# EAGLE board VERSAO-01 (EAGLE 5.06)
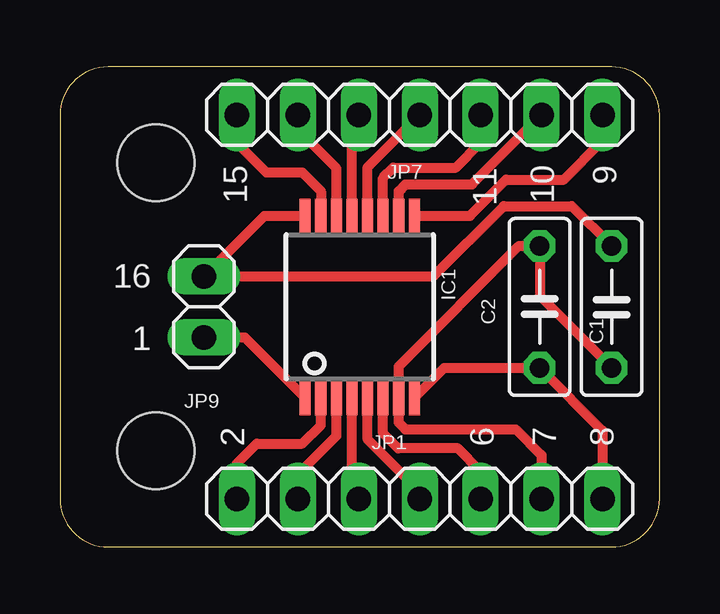
[diagram p0: board, top side]

Size 25 x 20 mm. Coordinates in mm from the lower left corner, seen from the top.
Outline: 23,0 arc90 25,2 25,18 arc90 23,20 2,20 arc90 0,18 0,2 arc90 2,0 23,0
Copper layers (1*16): Top 0.035mm / dielectric 1.5mm / Bottom 0.035mm
Design rules "default": minimum track width 10mil, minimum drill 24mil, track to track 8mil, track to pad 8mil, pad to pad 8mil, via to via 8mil, smd to smd 8mil, copper to edge 40mil, drill to drill 8mil, minimum pad ring 10mil, minimum via ring 8mil, stop-mask expansion 4mil, vias tented up to drill 0mil, thermal gap 10mil
Net classes: 0 default: width 0.508 mm, drill 0.508 mm, clearance 0.508 mm; 1 2: width 1.016 mm, drill 0.508 mm, clearance 0.762 mm; 2 3: width 1.016 mm, drill 1.016 mm, clearance 1.524 mm
Holes 3.2 mm at 4,4 4,16

## Footprints (pad centres in the part's own frame; a part is rotated, then mirrored left to right if it is on the bottom)
C050-025X075 = drill 0.813 octagon: 1 -2.54,0; 2 2.54,0
SSOP16 = smd 0.46 x 1.43: 1 -2.275,-3.795; 2 -1.625,-3.795; 3 -0.975,-3.795; 4 -0.325,-3.795; 5 0.325,-3.795; 6 0.975,-3.795; 7 1.625,-3.795; 8 2.275,-3.795; 9 2.275,3.795; 10 1.625,3.795; 11 0.975,3.795; 12 0.325,3.795; 13 -0.325,3.795; 14 -0.975,3.795; 15 -1.625,3.795; 16 -2.275,3.795
1X07 = drill 1.016 long: 1 -7.62,0; 2 -5.08,0; 3 -2.54,0; 4 0,0; 5 2.54,0; 6 5.08,0; 7 7.62,0
1X02 = drill 1.016 long: 1 -1.27,0; 2 1.27,0

## Placement (x,y rotation side)
C1  [C050-025X075]  23,10 270 top
C2  [C050-025X075]  20,10 90 top
IC1  AS5040  [SSOP16]  12.5,10 0 top
JP1  [1X07]  15,2 180 top
JP7  [1X07]  15,18 0 top
JP9  [1X02]  6,10 90 top

## Library data of the parts
C1 C2 = rcl
IC1 = austriamicrosystems
JP1 JP7 JP9 = pinhead

## Nets
+5V: C1.1 IC1.16 JP9.2
GND: C1.2 C2.2 IC1.7 JP1.2
N$1: IC1.12 JP7.4
N$2: IC1.11 JP7.5
N$3: IC1.13 JP7.3
N$4: IC1.2 JP1.7
N$5: IC1.4 JP1.5
N$6: IC1.3 JP1.6
N$7: IC1.5 JP1.4
N$8: C2.1 IC1.8 JP1.1
N$9: IC1.6 JP1.3
N$10: IC1.14 JP7.2
N$11: IC1.15 JP7.1
N$12: IC1.1 JP9.1
N$13: IC1.10 JP7.6
N$14: IC1.9 JP7.7

## Tracks (layer width: path | path; a pad name or v marks a point on that pad's centre or on a via)
+5V
  Top 0.406: IC1.16 8.53,13.79 JP9.2 15.57,11.27 18.5,14.2 21.34,14.2 C1.1
GND
  Top 0.406: JP1.2 20.08,3.82 19,4.9 14.4,4.9 14.12,5.17 IC1.7 14.12,7.53 19.14,12.54 C2.2 20,10.46 C1.2
N$1
  Top 0.406: IC1.12 12.82,15.82 JP7.4
N$2
  Top 0.406: IC1.11 13.47,15.38 13.9,15.8 16.5,15.8 17.54,16.84 JP7.5
N$3
  Top 0.406: IC1.13 12.18,17.71 JP7.3
N$4
  Top 0.406: IC1.2 10.88,5.08 10.1,4.3 8.2,4.3 7.38,3.48 JP1.7
N$5
  Top 0.406: IC1.4 12.18,2.29 JP1.5
N$6
  Top 0.406: IC1.3 11.53,4.62 9.92,3.02 JP1.6
N$7
  Top 0.406: IC1.5 12.82,4.47 15,2.3 JP1.4
N$8
  Top 0.406: IC1.8 16.03,7.46 C2.1 22.62,4.84 JP1.1
N$9
  Top 0.406: IC1.6 13.47,4.72 14.1,4.1 16.6,4.1 17.54,3.16 JP1.3
N$10
  Top 0.406: IC1.14 11.53,15.78 9.92,17.38 JP7.2
N$11
  Top 0.406: IC1.15 10.88,14.82 10.1,15.6 8.6,15.6 7.38,16.82 JP7.1
N$12
  Top 0.406: IC1.1 7.7,8.73 JP9.1
N$13
  Top 0.406: IC1.10 14.12,14.82 14.4,15.1 17.18,15.1 JP7.6
N$14
  Top 0.406: IC1.9 17.09,13.79 18.6,15.3 21,15.3 22.62,16.92 JP7.7

## Text on the board
tNames: 15 | 11 | 10 | 9 | 16 | 1 | 2 | 6 | 7 | 8